# Altium PCB Prakul_Swaminath_PCB1_DIGITAL CIRCUITRY.PcbDoc
Units mm, origin at the board's own origin, x right, y up, seen from the top; angles counter-clockwise.
Board outline 22.86 x 66.67 mm, 4 copper layers (Top Layer, Layer 2, Layer 3, Bottom Layer), stack 0.568 mm thick; 31 components, 50 nets, 110 pads, 18 vias.
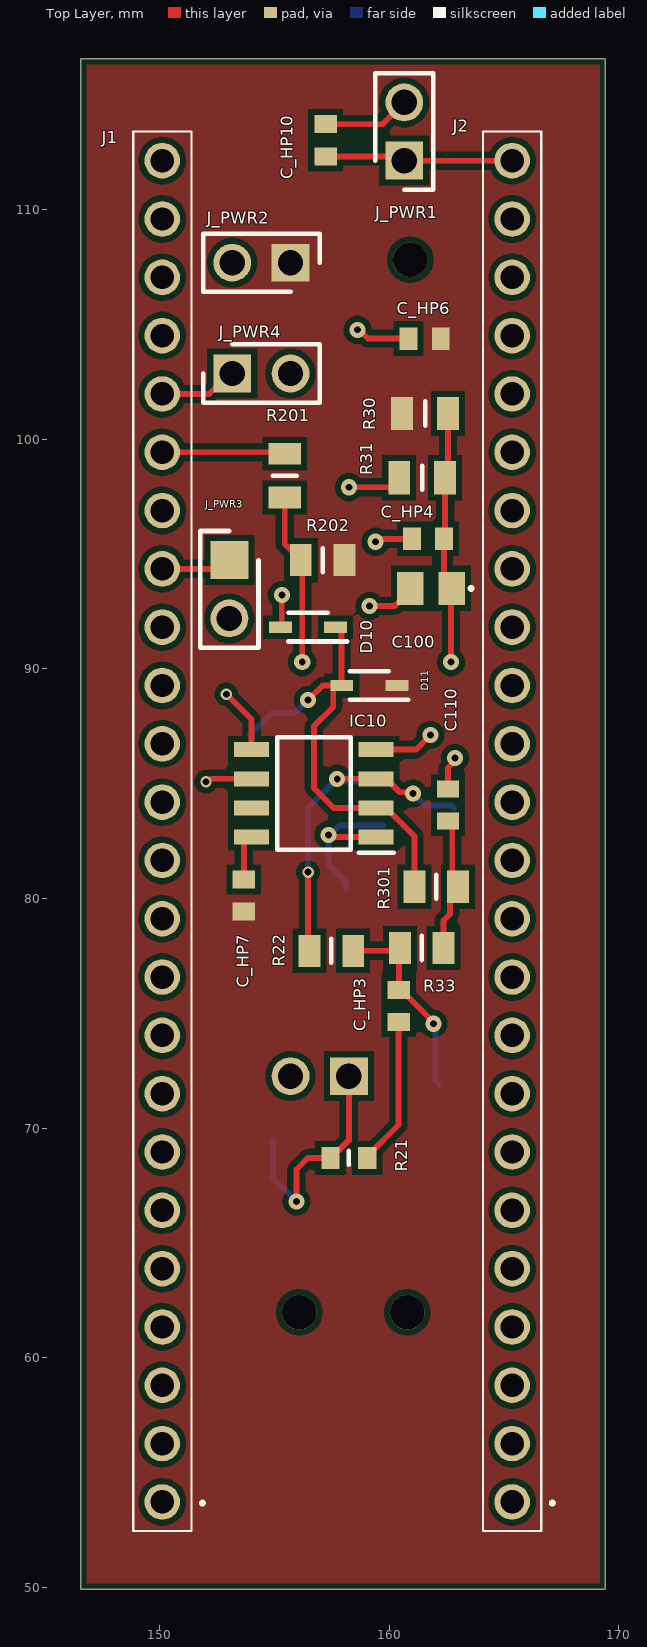
[diagram p0: Top Layer view]
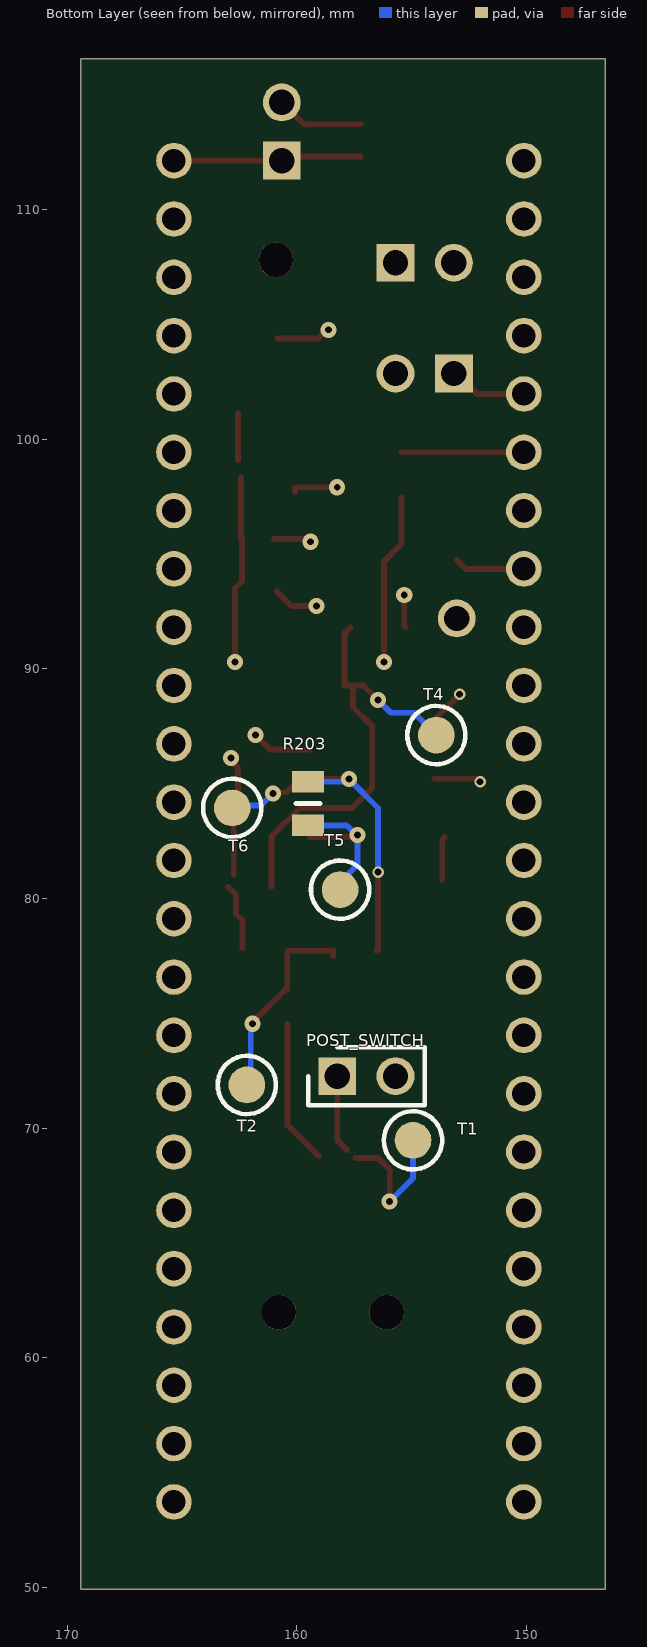
[diagram p1: Bottom Layer view, seen from below]
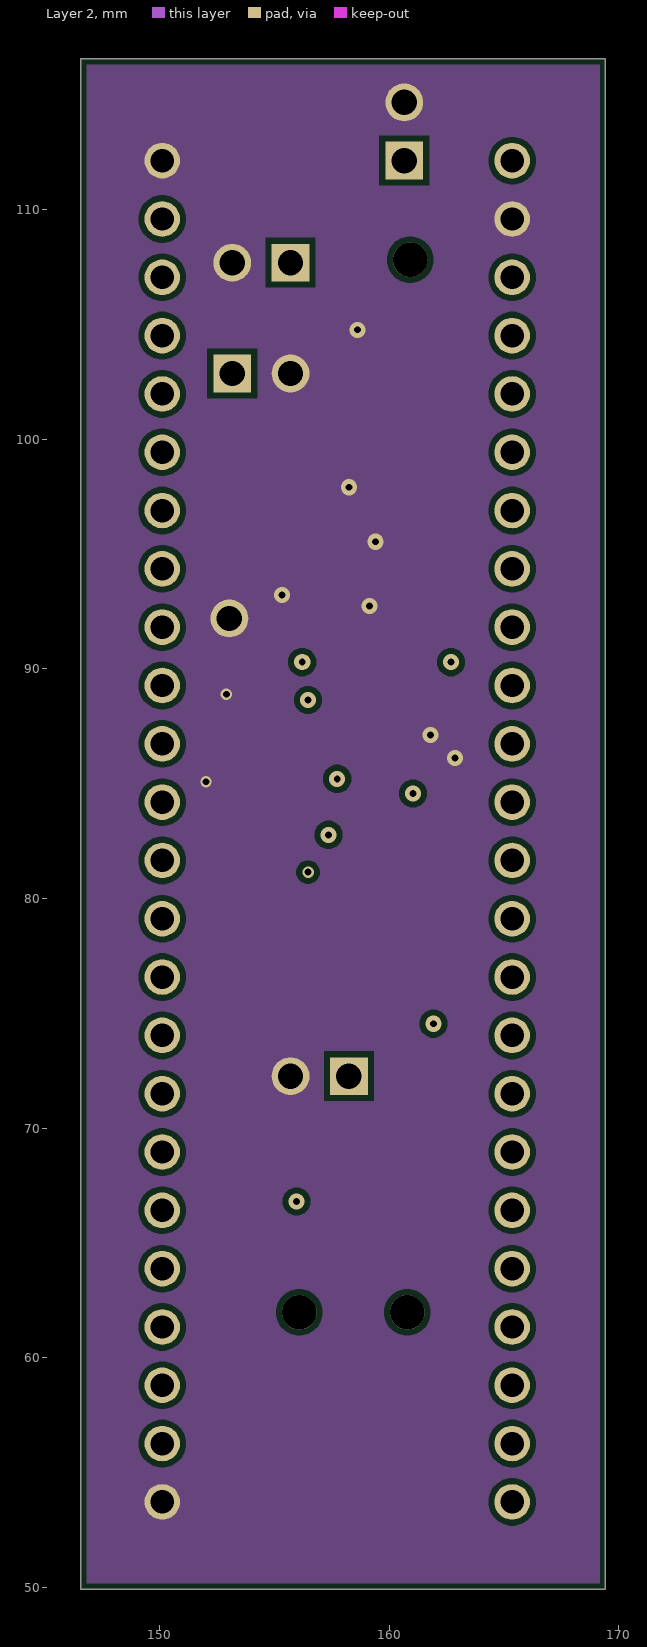
[diagram p2: Layer 2]
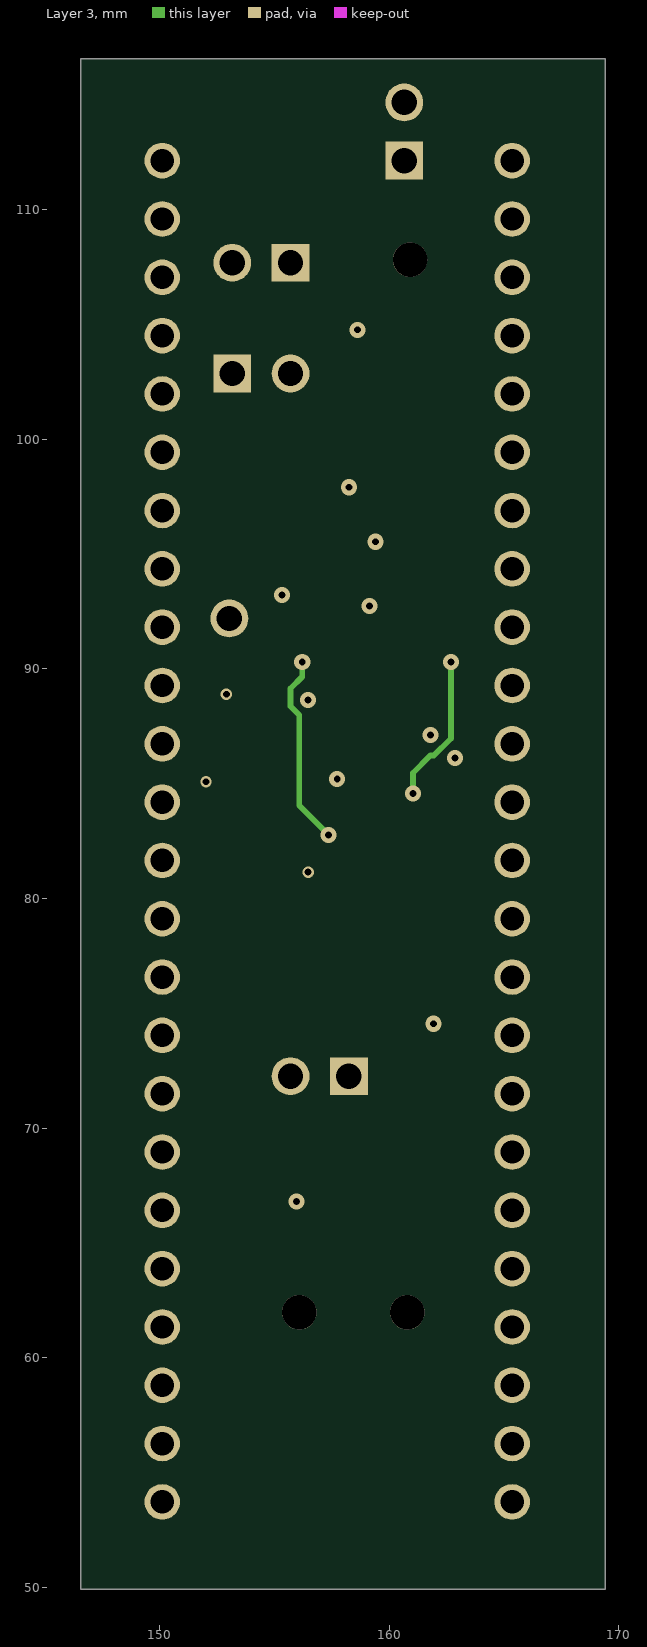
[diagram p3: Layer 3]
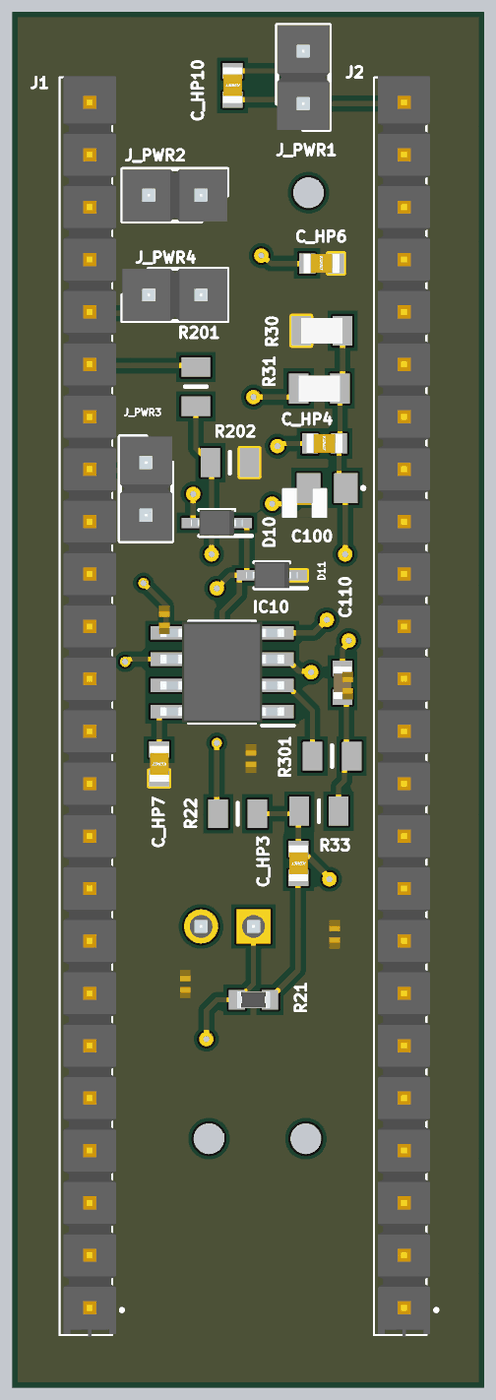
[diagram p4: 3D render of the assembled board from above, using the file's embedded part models]

## Layer stack, top to bottom
Top Solder: solder mask 0.0102, Solder Resist, Dk 3.5
Top Layer: signal copper 0.0356
Dielectric 2: prepreg 0.0711, PP-006, Dk 4.1
Layer 2: signal copper 0.0175
Dielectric 1: dielectric 0.32, FR-4, Dk 4.8
Layer 3: signal copper 0.0175
Dielectric 3: prepreg 0.0711, PP-006, Dk 4.1
Bottom Layer: signal copper 0.0356
Bottom Solder: solder mask 0.0102, Solder Resist, Dk 3.5

## Board outline
146.558,49.911 169.418,49.911 169.418,116.586 146.558,116.586

## Design rules (kind name [scope] priority, off if disabled: settings)
BoardOutlineClearance [All] p1: gap=0.254 ignorepadtopadclearanceinfootprint=FALSE
Clearance [All] p1: gap=0.254 ignorepadtopadclearanceinfootprint=FALSE
PlaneConnect [All] p1: planeconnectstyle=Direct reliefexpansion=0.508 reliefentries=4 reliefconductorwidth=0.254 reliefairgap=0.254
PolygonConnect [All] p1: connectstyle=Direct reliefconductorwidth=0.254 reliefentries=4 polygonreliefangle="90 Angle" airgapwidth=0.254
RoutingVias [All] p1: holewidth=0.3 width=0.7 viastyle="Through Hole" minholewidth=0.3 minwidth=0.7 maxholewidth=0.711 maxwidth=1.27
SilkToSolderMaskClearance [IsPad] p1: minsilkscreentomaskgap=0.254 clearancetoexposedcopper=FALSE
SolderMaskExpansion [All] p1: expansion=0.102 istentingtop=FALSE
SupplyNets "Schematic Supply Nets_16" [InNet('DGND')] p1: voltage=0.000
SupplyNets "Schematic Supply Nets_15" [InNet('AGND')] p2: voltage=0.000
SupplyNets "Schematic Supply Nets_14" [InNet('-5V_AFE')] p3: voltage=0.000
SupplyNets "Schematic Supply Nets_12" [InNet('+Vout')] p4: voltage=0.000
SupplyNets "Schematic Supply Nets_11" [InNet('+5V_AFE')] p5: voltage=0.000
SupplyNets "Schematic Supply Nets_10" [InNet('12V_AFE')] p6: voltage=0.000
SupplyNets "Schematic Supply Nets_9" [InNet('+5V_DIG')] p7: voltage=0.000
SupplyNets "Schematic Supply Nets_8" [InNet('PGND')] p8: voltage=0.000
SupplyNets "Schematic Supply Nets_7" [InNet('3.3V_DIG')] p9: voltage=0.000
SupplyNets "Schematic Supply Nets_6" [InNet('12V_ANG')] p10: voltage=0.000
SupplyNets "Schematic Supply Nets_4" [InNet('Coil_P')] p11: voltage=0.000
SupplyNets "Schematic Supply Nets_3" [InNet('+5V_IN')] p12: voltage=0.000
SupplyNets "Schematic Supply Nets_2" [InNet('-Vout')] p13: voltage=0.000
SupplyNets "Schematic Supply Nets_1" [InNet('STAR_GND')] p14: voltage=0.000
SupplyNets "Schematic Supply Nets" [InNet('+3V3_DIG')] p15: voltage=0.000
Width [All] p1: maxlimit=5 minlimit=0.254 preferedwidth=0.254
28 further rules are at their usual default settings.

## Classes and differential pairs
component class Sheet2: C9 C10 C11 C12 C13 C14 C15 C16 C17 D5 D6 IC5 R8 R9 R10 R11 R12 R13 S1
component class Mason_Polarization: C1 C2 C3 C4-0.1uF C5-2.2uF C_SNUB-4.7nF D1 D2 F1 IC8 J1 Q1 Q2 R1_SNUB-4.7ohm R2-4.7ohm R3-4.7ohm Z2
component class Input_Blanking: C4 C5 IC3 J2 R2 R3 R4 R5 "R Holder1" "R Holder2"

## Components (designator, comment, footprint, x,y, rotation, side; value= is the part's Value field where it differs from the comment)
C100 "C0805C105K5RACTU" C0805 161.815,93.509 r180 top
C110 "GRM188R71H222KA01D" CAPC1608X90N 162.56,84.074 r90 top
C_HP3 "C0603C104K5RACTU7042" CAPC1608X95N 160.419,75.317 r90 top
C_HP4 "C0603C104K5RACTU7042C0603C104K5RACTU7042" CAPC1608X95N 161.688,95.668 r180 top
C_HP6 "C0603C104K5RACTU7042C0603C104K5RACTU7042" CAPC1608X95N 161.544,104.394 r180 top
C_HP7 "C0603C104K5RACTU7042C0603C104K5RACTU7042" CAPC1608X95N 153.67,80.137 r90 top
C_HP10 "C0603C104K5RACTU7042C0603C104K5RACTU7042" CAPC1608X95N 157.226,113.03 r90 top
D10 "BAT54HT1G" SOD2512X110N 156.464,91.821 r180 top
D11 "BAT54HT1G" SOD2512X110N 159.131,89.281 r180 top
IC10 "LM393DRG3" SOIC127P600X175-8N 156.718,84.582 r180 top
J1 "TSW-124-07-G-S" TSW-124-XX-YY-S 150.114,53.721 r90 top
J2 "TSW-124-07-G-S" TSW-124-XX-YY-S 165.354,53.721 r90 top
J_PWR1 "TSW-102-07-G-S-002" HDRV2W64P0X254_1X2_508X254X838P#1 160.655,112.141 r270 top
J_PWR2 "TSW-102-07-G-S-002" HDRV2W64P0X254_1X2_508X254X838P#1 155.702,107.696 r0 top
J_PWR3 "TSW-102-07-G-S-002" HDRV2W64P0X254_1X2_508X254X838P#2 153.035,94.742 r90 top
J_PWR4 "TSW-102-07-G-S-002" HDRV2W64P0X254_1X2_508X254X838P#1 153.162,102.87 r180 top
POST_SWITCH "TSW-102-07-G-S-002" HDRV2W64P0X254_1X2_508X254X838P#1 158.242,72.263 r0 bottom
R21 "RMCF0603FT1K00" RESC1608X55N 158.242,68.707 r0 top
R22 "RC0805FR-07100KL" RESC2012X60N 157.48,77.724 r180 top
R30 "CRCW080510K0JNEA" RESC2012X50N 161.561,101.129 r0 top
R31 "CRCW080510K0JNEA" RESC2012X50N 161.434,98.335 r180 top
R33 "RC0402JR-074K7L" RESC2012X60N 161.417,77.851 r180 top
R201 "CRCW080547R0FKEA" RESC2012X60N 155.448,98.425 r90 top
R202 "CRCW08054K70FKEA" RESC2012X60N 157.099,94.742 r180 top
R203 "CRCW08051M00FKEAHP" RESC2012X60N 159.512,84.14 r90 bottom
R301 "RC0805FR-07220RL" RESC2012X60N 162.052,80.518 r180 top
T1 "5000" 5000 154.94,69.469 r270 bottom
T2 "5000" 5000 162.179,71.882 r270 bottom
T4 "5000" 5000 153.924,87.122 r270 bottom
T5 "5000" 5000 158.115,80.391 r270 bottom
T6 "5000" 5000 162.814,83.947 r270 bottom

## Footprints (in the part's own frame and the unit in brackets; to place one, negate y for a bottom-side part, rotate by r counter-clockwise, add the part's x,y. Pads: shape width x height; smd on the part's side, far side on the other; paste and mask are expansions set on the pad)
5000 [mm]
  round 1.6 smd: 1(0,0)
  silkscreen extent -1.27,-1.27 1.27,1.27, body extent -1.26,-1.27 1.26,1.27, height 5
C0805 [mm]
  rect 1.15x1.45 smd: 1(-0.9,0) 2(0.9,0)
  silkscreen extent -1.8,-0.05 -1.7,0.05, body extent 0,0 2.2,1.45
CAPC1608X90N [mm]
  rect 0.75x0.94 smd: 1(-0.7,0) 2(0.7,0)
  body extent -0.8,-0.45 0.8,0.45, height 0.8
CAPC1608X95N [mm]
  rect 0.78x0.98 smd: 1(-0.7,0) 2(0.7,0)
  body extent -0.87,-0.48 0.88,0.47, height 0.87
HDRV2W64P0X254_1X2_508X254X838P#1 [mm]
  rect 1.65x1.65 hole 1.1: 1(0,0)
  round 1.65 hole 1.1: 2(-2.54,0)
  silkscreen extent -3.81,-1.27 1.27,1.27, body extent -3.81,-1.27 1.27,1.27, height 8.38
HDRV2W64P0X254_1X2_508X254X838P#2 [mm]
  rect 1.65x1.65 smd: 1(0,0)
  round 1.65 hole 1.1: 2(-2.54,0)
  silkscreen extent -3.81,-1.27 1.27,1.27, body extent -3.81,-1.27 1.27,1.27, height 8.38
RESC1608X55N [mm]
  rect 0.8x0.95 smd: 1(-0.8,0) 2(0.8,0)
  silkscreen extent 0,-0.3 0,0.3, body extent -0.8,-0.4 0.8,0.4, height 0.46
RESC2012X50N [mm]
  rect 0.95x1.45 smd: 1(-1,0) 2(1,0)
  silkscreen extent 0,-0.53 0,0.53, body extent -1,-0.62 1,0.63, height 0.45
RESC2012X60N [mm]
  rect 0.95x1.4 smd: 1(-0.95,0) 2(0.95,0)
  silkscreen extent 0,-0.53 0,0.53
SOD2512X110N [mm]
  rect 1x0.5 smd: 1(-1.2,0) 2(1.2,0)
  silkscreen extent -1.7,-0.63 0.85,0.63, body extent -1.25,-0.63 1.25,0.63, height 1.1
SOIC127P600X175-8N [mm]
  rect 1.525x0.65 smd: 1(-2.712,1.905) 2(-2.712,0.635) 3(-2.712,-0.635) 4(-2.712,-1.905) 5(2.712,-1.905) 6(2.712,-0.635) 7(2.712,0.635) 8(2.712,1.905)
  silkscreen extent -3.47,-2.45 1.6,2.58, body extent -3,-2.45 3,2.45, height 1.75
TSW-124-XX-YY-S [mm]
  round 1.55 hole 1.02: 1(0,0) 2(2.54,0) 3(5.08,0) 4(7.62,0) 5(10.16,0) 6(12.7,0) 7(15.24,0) 8(17.78,0) 9(20.32,0) 10(22.86,0) 11(25.4,0) 12(27.94,0) 13(30.48,0) 14(33.02,0) 15(35.56,0) 16(38.1,0) 17(40.64,0) 18(43.18,0) 19(45.72,0) 20(48.26,0) 21(50.8,0) 22(53.34,0) 23(55.88,0) 24(58.42,0)
  silkscreen extent -1.27,-1.8 59.69,1.27, body extent -1.34,-1.46 59.75,1.08, height 8.25

## Part data
C100: "Capacitor", Manufacturer_Name="Yageo Group", Mouser Part Number=80-C0805C105K5R, Arrow Part Number=C0805C105K5RACTU, Arrow Price/Stock=https://www.arrow.com/en/products/c0805c105k5ractu/kemet-corporation?region=nac, Datasheet Link=https://www.yageogroup.com/content/datasheet/asset/file/KEM_C1002_X7R_SMD, Height=1.1mm, Manufacturer_Part_Number=C0805C105K5RACTU, Mouser Price/Stock=https://www.mouser.co.uk/ProductDetail/KEMET/C0805C105K5RACTU?qs=iP0bYSAMAFrBrUflcErrLQ%3D%3D
C110: "Capacitor", Manufacturer_Name="Murata Electronics", Mouser Part Number=81-GRM39X222K50D, Arrow Part Number=GRM188R71H222KA01D, Arrow Price/Stock=https://www.arrow.com/en/products/grm188r71h222ka01d/murata-manufacturing?utm_currency=USD&region=europe, Datasheet Link=https://search.murata.co.jp/Ceramy/image/img/A01X/G101/ENG/GRM188R71H222KA01-01.pdf, Height=0.9mm, Manufacturer_Part_Number=GRM188R71H222KA01D, Mouser Price/Stock=https://www.mouser.co.uk/ProductDetail/Murata-Electronics/GRM188R71H222KA01D?qs=mv1J312wYL%252BkIvLULkLWIw%3D%3D
C_HP3: "Capacitor", Manufacturer_Name=YAGEO, Arrow Part Number=C0603C104K5RACTU7042, Arrow Price/Stock=https://www.arrow.com/en/products/c0603c104k5ractu7042/kemet-corporation, Datasheet Link=https://www.arrow.com/en/products/c0603c104k5ractu7042/kemet-corporation, Height=0.95mm, Manufacturer_Part_Number=C0603C104K5RACTU7042
C_HP4 C_HP6 C_HP7 C_HP10: library part C0603C104K5RACTU7042, "Capacitor", Manufacturer_Name=YAGEO, Arrow Part Number=C0603C104K5RACTU7042, Arrow Price/Stock=https://www.arrow.com/en/products/c0603c104k5ractu7042/kemet-corporation, Datasheet Link=https://www.arrow.com/en/products/c0603c104k5ractu7042/kemet-corporation, Height=0.95mm, Manufacturer_Part_Number=C0603C104K5RACTU7042
D10 D11: "Schottky Diode", Manufacturer_Name=onsemi, Mouser Part Number=863-BAT54HT1G, Arrow Part Number=BAT54HT1G, Arrow Price/Stock=https://www.arrow.com/en/products/bat54ht1g/on-semiconductor?utm_currency=USD&region=europe, Datasheet Link=https://www.onsemi.com/pub/Collateral/BAT54HT1-D.PDF, Height=1.1mm, Manufacturer_Part_Number=BAT54HT1G, Mouser Price/Stock=https://www.mouser.co.uk/ProductDetail/onsemi/BAT54HT1G?qs=vLkC5FC1VN%252BK3ZQA%252ByHPIA%3D%3D
IC10: "Integrated Circuit", Manufacturer_Name="Texas Instruments", Mouser Part Number=595-LM393DRG3, Arrow Part Number=LM393DRG3, Arrow Price/Stock=https://www.arrow.com/en/products/lm393drg3/texas-instruments.html?utm_currency=USD&region=nac, Datasheet Link=http://www.ti.com/lit/gpn/lm393, Height=1.75mm, Manufacturer_Part_Number=LM393DRG3, Mouser Price/Stock=https://www.mouser.co.uk/ProductDetail/Texas-Instruments/LM393DRG3?qs=EuM%2FBx4ov4Qjo1J98GenvQ%3D%3D
J1 J2: "Connector", Manufacturer_Name=SAMTEC, Mouser Part Number=200-TSW12407GS, Arrow Part Number=TSW-124-07-G-S, Arrow Price/Stock=https://www.arrow.com/en/products/tsw-124-07-g-s/samtec, Datasheet Link=http://suddendocs.samtec.com/prints/tsw-xxx-xx-xxx-x-xx-xxx-mkt.pdf, Manufacturer_Part_Number=TSW-124-07-G-S, Mouser Price/Stock=https://www.mouser.co.uk/ProductDetail/Samtec/TSW-124-07-G-S?qs=rU5fayqh%252BE3R3972xmCA0A%3D%3D
J_PWR1 J_PWR2 J_PWR3 J_PWR4 POST_SWITCH: "Connector", Manufacturer_Name=SAMTEC, Mouser Part Number=200-TSW-10207GS002, Arrow Part Number=TSW-102-07-G-S-002, Arrow Price/Stock=https://www.arrow.com/en/products/tsw-102-07-g-s-002/samtec?utm_currency=USD&region=nac, Datasheet Link=http://suddendocs.samtec.com/prints/tsw-xxx-xx-xxx-x-xx-xxx-mkt.pdf, Height=8.38mm, Manufacturer_Part_Number=TSW-102-07-G-S-002, Mouser Price/Stock=https://www.mouser.co.uk/ProductDetail/Samtec/TSW-102-07-G-S-002?qs=icabnvfcbsHvpvHCodBv1Q%3D%3D
R21: "Resistor", Manufacturer_Name="Stackpole Electronics", Mouser Part Number=708-RMCF0603FT1K00, Arrow Part Number=RMCF0603FT1K00, Arrow Price/Stock=https://www.arrow.com/en/products/rmcf0603ft1k00/stackpole-electronics?utm_currency=USD&region=nac, Datasheet Link=https://www.seielect.com/Catalog/SEI-RMCF_RMCP.pdf, Height=0.55mm, Manufacturer_Part_Number=RMCF0603FT1K00, Mouser Price/Stock=https://www.mouser.co.uk/ProductDetail/SEI-Stackpole/RMCF0603FT1K00?qs=FESYatJ8odI%252BYiPlprc1Pg%3D%3D
R22: "Resistor", Manufacturer_Name=YAGEO, Mouser Part Number=603-RC0805FR-07100KL, Arrow Part Number=RC0805FR-07100KL, Arrow Price/Stock=https://www.arrow.com/en/products/rc0805fr-07100kl/yageo?region=nac, Datasheet Link=http://www.yageo.com/documents/recent/PYu-RC_Group_51_RoHS_L_10.pdf, Height=0.6mm, Manufacturer_Part_Number=RC0805FR-07100KL, Mouser Price/Stock=https://www.mouser.co.uk/ProductDetail/YAGEO/RC0805FR-07100KL?qs=8Y8p%252BasKcI7rEWn6FcVdAA%3D%3D
R30 R31: "Resistor", Manufacturer_Name=Vishay, Mouser Part Number=71-CRCW0805J-10K-E3, Arrow Part Number=CRCW080510K0JNEA, Arrow Price/Stock=https://www.arrow.com/en/products/crcw080510k0jnea/vishay.html?utm_currency=USD&region=nac, Datasheet Link=http://www.vishay.com/docs/20035/dcrcwe3.pdf, Height=0.5mm, Manufacturer_Part_Number=CRCW080510K0JNEA, Mouser Price/Stock=https://www.mouser.co.uk/ProductDetail/Vishay-Dale/CRCW080510K0JNEA?qs=LOX6nxTstiZtNB6HA62jyQ%3D%3D
R33: library part RC0805FR-07100KL, "Resistor", Manufacturer_Name=YAGEO, Mouser Part Number=603-RC0805FR-07100KL, Arrow Part Number=RC0805FR-07100KL, Arrow Price/Stock=https://www.arrow.com/en/products/rc0805fr-07100kl/yageo?region=nac, Datasheet Link=http://www.yageo.com/documents/recent/PYu-RC_Group_51_RoHS_L_10.pdf, Height=0.6mm, Manufacturer_Part_Number=RC0805FR-07100KL, Mouser Price/Stock=https://www.mouser.co.uk/ProductDetail/YAGEO/RC0805FR-07100KL?qs=8Y8p%252BasKcI7rEWn6FcVdAA%3D%3D
R201 R202: library part CRCW080510K0FKEAHP, "Resistor", Manufacturer_Name=Vishay, Mouser Part Number=71-CRCW080510K0FKEAH, Arrow Part Number=CRCW080510K0FKEAHP, Arrow Price/Stock=https://www.arrow.com/en/products/crcw080510k0fkeahp/vishay.html?utm_currency=USD&region=europe, Datasheet Link=https://componentsearchengine.com/Datasheets/1/CRCW08051R00FKEAHP.pdf, Height=0.6mm, Manufacturer_Part_Number=CRCW080510K0FKEAHP, Mouser Price/Stock=https://www.mouser.co.uk/ProductDetail/Vishay-Dale/CRCW080510K0FKEAHP?qs=FlFvgi4rxBybVOW6oiRQjA%3D%3D
R203: "Resistor", Manufacturer_Name=Vishay, Mouser Part Number=71-CRCW08051M00FKEAH, Arrow Part Number=CRCW08051M00FKEAHP, Arrow Price/Stock=https://www.arrow.com/en/products/crcw08051m00fkeahp/vishay?utm_currency=USD&region=nac, Datasheet Link=https://componentsearchengine.com/Datasheets/1/CRCW08051R00FKEAHP.pdf, Height=0.6mm, Manufacturer_Part_Number=CRCW08051M00FKEAHP, Mouser Price/Stock=https://www.mouser.co.uk/ProductDetail/Vishay-Dale/CRCW08051M00FKEAHP?qs=k2%2FDWSARqgF%252BgsChW9CloQ%3D%3D
R301: "Resistor", Manufacturer_Name=YAGEO, Mouser Part Number=603-RC0805FR-07220RL, Arrow Part Number=RC0805FR-07220RL, Arrow Price/Stock=https://www.arrow.com/en/products/rc0805fr-07220rl/yageo?region=nac, Datasheet Link=http://www.yageo.com/documents/recent/PYu-RC_Group_51_RoHS_L_10.pdf, Height=0.6mm, Manufacturer_Part_Number=RC0805FR-07220RL, Mouser Price/Stock=https://www.mouser.co.uk/ProductDetail/Yageo/RC0805FR-07220RL/?qs=KCkj9j0IqmXa4o%252BHKR6RGw%3D%3D
T1 T2 T4 T5 T6: "Connector", Manufacturer_Name="Keystone Electronics", Mouser Part Number=534-5000, Arrow Part Number=5000, Arrow Price/Stock=https://www.arrow.com/en/products/5000/keystone-electronics.html?utm_currency=USD&region=europe, Datasheet Link=http://www.keyelco.com/product-pdf.cfm?p=1309, Manufacturer_Part_Number=5000, Mouser Price/Stock=https://www.mouser.co.uk/ProductDetail/Keystone-Electronics/5000?qs=q0tsjPZWdm%252B9SiiTAbEwUw%3D%3D

## Free pads (board coordinates)
  round 1.5 hole 1.5 unplated: 2(160.782,61.976) 3(160.909,107.823) 6(156.083,61.976)

## Via types
v1: diameter 0.7, hole 0.3, Top Layer to Bottom Layer, 15 vias
v2: diameter 0.5, hole 0.3, Top Layer to Bottom Layer, 3 vias

## Nets (pads, with @x,y where several pads share a name; then routed paths per layer and width w, separated by ;. In a path a pad name is that pad's centre, name@x,y a point inside that pad or via, vN(x,y) a via of type N, cw(c..) or ccw(c..) an arc to the next point about the centre after c; other vN are vias at no path point)
3.3V_DIG: C_HP6.1 C_HP7.1 D11.1 J_PWR2.1 R30.1 R202.1
12V_AFE: 
12V_ANG: 
12V_Raw: 
+3V3_DIG: 
+5V_AFE: 
+5V_DIG: 
+5V_IN: C_HP10.1 J2.24 J_PWR1.1 | length 8.2
  Top Layer w0.254: C_HP10.1 160.466,112.33 J_PWR1.1 J2.24
+Vout: 
-5V_AFE: 
-Vout: 
AGND: 
BAT+: 
Bat+ANG: 
BLANK_EN: J1.20 J_PWR4.1 | length 3.3
  Top Layer w0.254: J1.20 152.146,101.981 J_PWR4.1@153.035,102.87
Coil_N: 
Coil_P: 
DGND: C100.2 C110.2 C_HP4.2 C_HP6.2 C_HP10.2 D10.2 IC10.4 IC10.5 IC10.6 J1.1 J1.24 J2.23 J_PWR1.2 J_PWR2.2 J_PWR3.2 J_PWR4.2 POST_SWITCH.2 R31.2 | length 22
  Top Layer w0.254: v2(152.019,85.09) 152.086,85.09 152.213,85.217 IC10.6 ; v2(152.908,88.9) 154.006,87.802 IC10.5 ; D10.2 155.321,91.878 v1(155.321,93.218) ; C_HP10.2 159.704,113.73 J_PWR1.2 ; v1(158.242,97.917) 160.086,97.917 R31.2@160.086,97.737 ; v1(158.623,104.775) 158.69,104.775 159.071,104.394 C_HP6.2 ; v1(159.148,92.747) 160.238,92.747 C100.2@160.877,93.386 ; IC10.4 161.163,86.487 v1(161.798,87.122) ; v1@159.596,95.668 C_HP4.2 ; C110.2 162.556,84.778 162.556,85.692 162.861,85.997 v1(162.861,86.117)
  other v1: 159.402,95.541
FID_ZC_MCU: J1.19 R201.2 | length 5.3
  Top Layer w0.254: J1.19 R201.2@155.448,99.441
NetC1P_2: 
NetC13_1: 
NetC100_1: C100.1 C_HP4.1 IC10.3 R22.2 R30.2 R31.1 R203.2 T6.1 | length 32.4
  Top Layer w0.254: v2(156.464,81.153) 156.464,77.79 R22.2 ; v1(157.734,85.217) IC10.3 IC10.3@159.868,85.217 ; IC10.3@160.066,85.415 IC10.3@159.868,85.217 ; v1(161.036,84.582) 160.989,84.629 160.455,84.629 IC10.3@159.868,85.217 ; C_HP4.1 162.388,93.836 C100.1 ; C_HP4.1@162.434,95.714 R31.1 ; 162.561,99.097 R30.2 ; v1(162.687,90.297) C100.1@162.687,93.481
  Layer 3 w0.254: v1(161.036,84.582) 161.036,85.474 161.791,86.229 161.939,86.229 162.687,86.977 v1(162.687,90.297)
  Bottom Layer w0.254: v2(156.464,81.153) 156.464,83.947 v1(157.734,85.217) 157.801,85.217 157.928,85.09 R203.2 ; v1(161.036,84.582) 161.566,84.052 162.709,84.052 T6.1
NetC110_1: C110.1 R33.1 R301.1 | length 5.2
  Top Layer w0.254: R33.1 162.367,79.041 162.654,79.328 162.654,80.17 R301.1 ; R301.1@162.748,81.055 C110.1@162.748,83.374
NetC_HP3_1: C_HP3.1 R21.2 | length 6.3
  Top Layer w0.254: R21.2@159.042,68.782 160.401,70.141 C_HP3.1@160.401,74.549
NetC_HP3_2: C_HP3.2 R22.1 R33.2 T2.1 | length 8.8
  Top Layer w0.254: R22.1@158.43,77.499 R22.1 160.369,77.724 160.419,77.674 C_HP3.2 160.519,76.017 161.925,74.611 v1(161.925,74.549)
  Bottom Layer w0.254: v1(161.925,74.549) 162.01,74.464 162.01,72.051 T2.1
NetC_HP7_2: C_HP7.2 IC10.8 | length 1.9
  Top Layer w0.254: IC10.8@153.568,82.677 153.67,82.575 C_HP7.2
NetC_SNUB-4.7nF_1: 
NetCVCC_1: 
NetD10_1: D10.1 D11.2 IC10.2 R301.2 T4.1 | length 19.8
  Top Layer w0.254: v1(156.464,88.646) 157.099,89.281 D11.2@157.681,89.281 ; D10.1 157.918,91.567 D11.2@157.918,89.294 ; D11.2 D11.2@157.681,89.281 ; R301.2 161.102,82.713 159.868,83.947 IC10.2 157.586,83.947 156.718,84.815 156.718,87.503 157.558,88.343 157.558,89.158 D11.2@157.681,89.281
  Bottom Layer w0.254: T4.1 154.893,88.091 155.909,88.091 v1(156.464,88.646)
NetD12_2: 
NetIC5_2: 
NetIC5_3: 
NetIC5_7: 
NetIC10_1: IC10.1 R201.1 R202.2 R203.1 T5.1 | length 23.3
  Top Layer w0.254: R201.1 155.448,95.443 R202.2 156.21,94.681 v1(156.21,90.297) ; v1(157.357,82.777) 157.424,82.777 157.524,82.677 IC10.1
  Layer 3 w0.254: v1(156.21,90.297) 156.21,89.663 155.702,89.155 155.702,88.374 156.083,87.993 156.083,84.051 v1(157.357,82.777)
  Bottom Layer w0.254: T5.1 158.115,80.716 157.357,81.474 v1(157.357,82.777) 157.424,82.777 157.836,83.19 R203.1 R203.1@159.737,83.19
NetPOST_SWITCH_1: POST_SWITCH.1 R21.1 T1.1 | length 10.1
  Top Layer w0.254: v1(155.956,66.802) 155.956,68.199 156.464,68.707 R21.1 ; R21.1@157.828,69.055 158.242,69.469 POST_SWITCH.1 ; POST_SWITCH.1@157.988,72.009 157.988,72.122 158.223,72.357 POST_SWITCH.1@158.336,72.357
  Bottom Layer w0.254: T1.1 154.94,67.818 v1(155.956,66.802)
NetQ1_1: 
NetQ2_1: 
PGND: J1.2
POLARIZATION_EN: J1.17 J_PWR3.1 | length 3.1
  Top Layer w0.254: J1.17 152.654,94.361 J_PWR3.1
RX_FILT_N: 
RX_FILT_P: 
RX_IN_N: 
RX_IN_N_RAW: J2.2
RX_IN_P: 
RX_IN_P_RAW: J2.1
RX_INA_OUT: 
RX_INN_FILT: 
RX_INP_FILT: 
STAR_GND: 
SW: 
pads on no net: IC10.7 J1.3 J1.4 J1.5 J1.6 J1.7 J1.8 J1.9 J1.10 J1.11 J1.12 J1.13 J1.14 J1.15 J1.16 J1.18 J1.21 J1.22 J1.23 J2.3 J2.4 J2.5 J2.6 J2.7 J2.8 J2.9 J2.10 J2.11 J2.12 J2.13 J2.14 J2.15 J2.16 J2.17 J2.18 J2.19 J2.20 J2.21 J2.22

## Polygon pours and split planes (outlines as drawn)
DGND on Layer 2 "DGND_L02_P000" (solid, pour order 0): 143.002,118.872 143.891,117.983 175.133,117.983 175.133,43.815 175.006,43.688 137.922,43.688
3.3V_DIG on Top Layer "3.3V_DIG_L01_P002" (solid, remove dead copper, pour order 2): 145.719,116.903 146.1,117.284 170.865,117.284 170.865,47.942 170.103,47.18 145.084,47.18

## Silkscreen, mask and mechanical layers (free items; w line width, h text height)
Mechanical 1:
  lines w0.254: 146.558,49.911 146.558,116.586 146.939,116.586 169.418,116.586 169.418,49.911 146.558,49.911